# EAGLE board main_board (EAGLE 9.6.2)
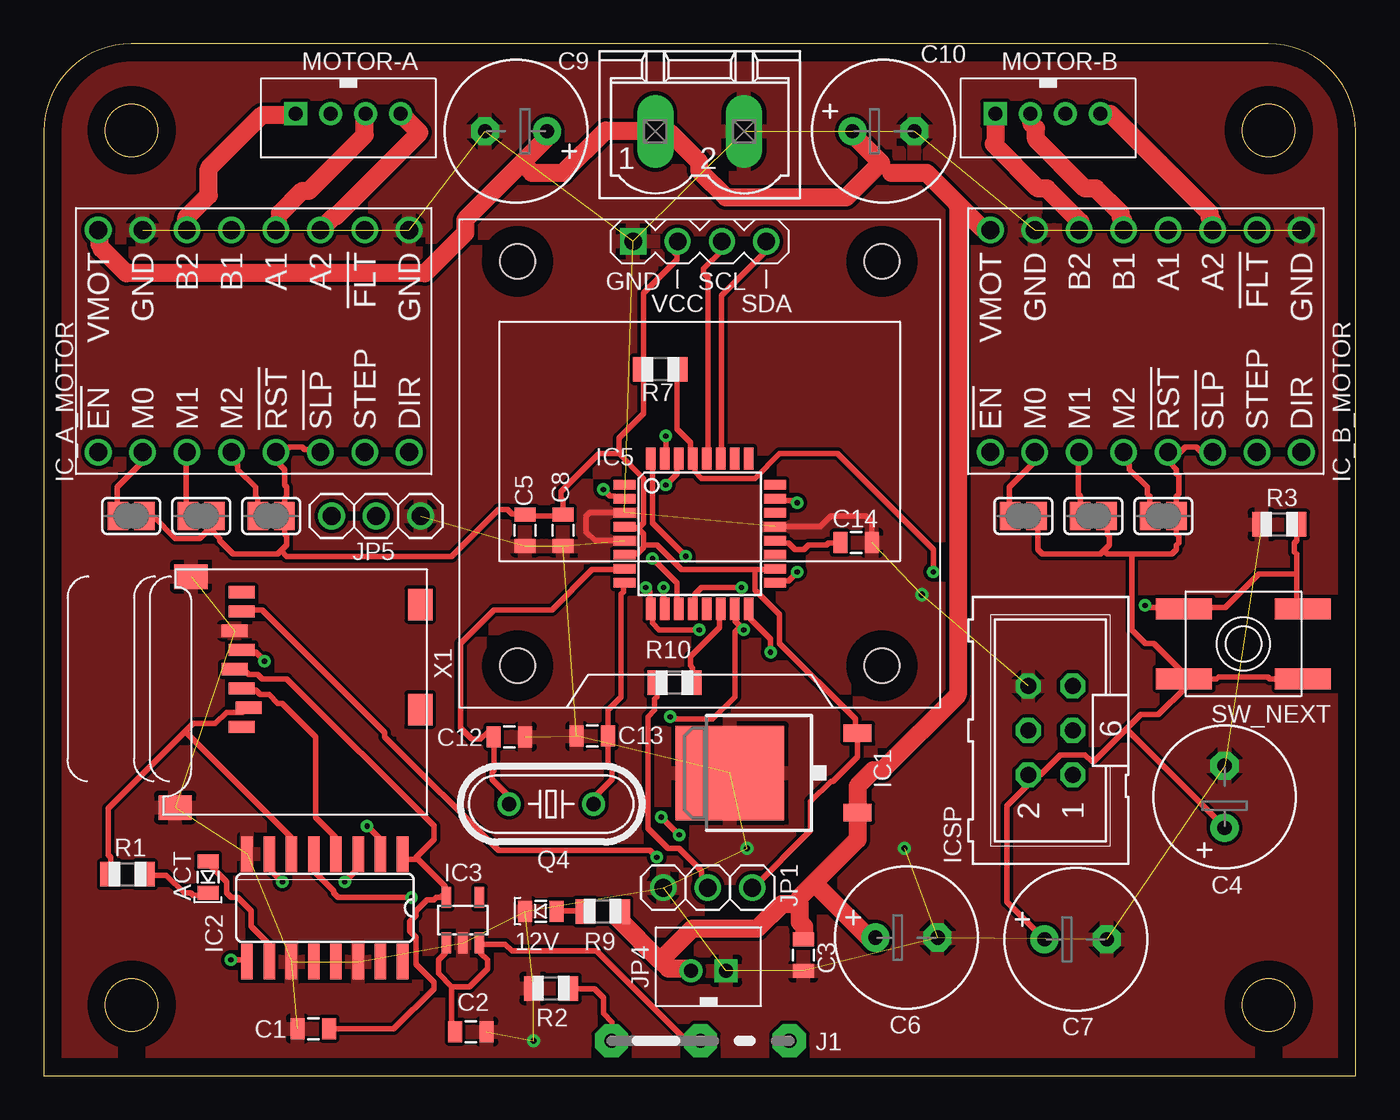
[diagram p0: board, top side]
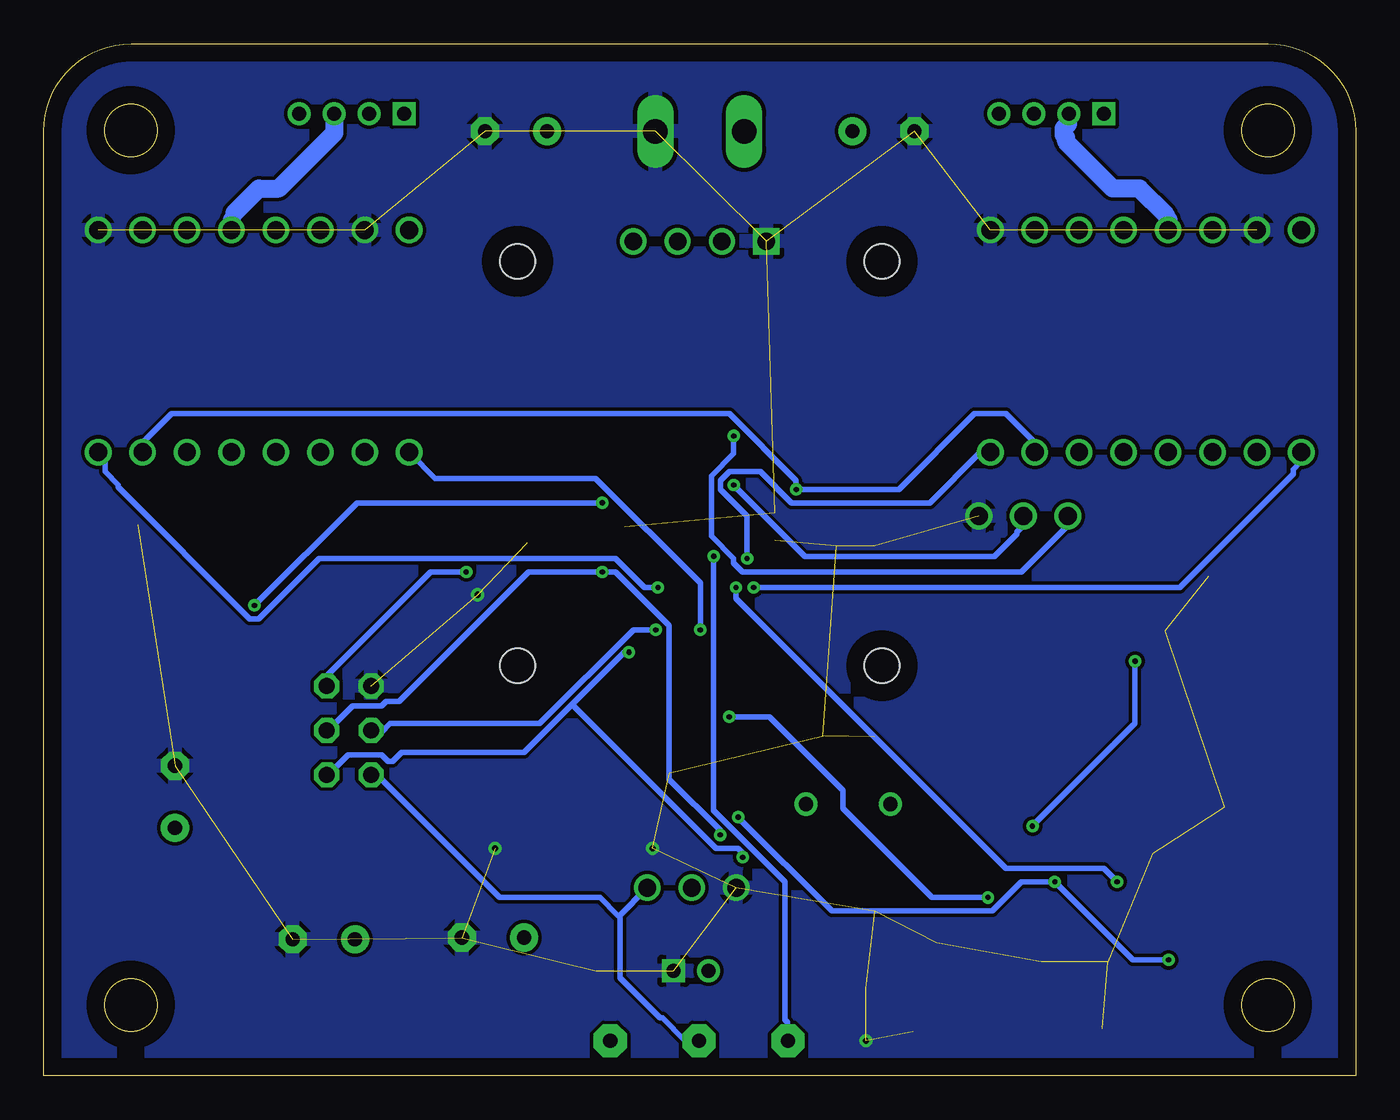
[diagram p1: board, bottom side, seen from below]

Size 75 x 59 mm. Coordinates in mm from the lower left corner, seen from the top.
Outline: 70,59 5,59 arc90 0,54 0,0 75,0 75,54 arc90 70,59
Outline: circle at 70.02,4.05 radius 1.5
Outline: circle at 5.02,54.05 radius 1.5
Outline: circle at 5.02,4.05 radius 1.5
Outline: circle at 70.02,54.05 radius 1.5
Copper layers (1*16): Top 0.035mm / dielectric 1.5mm / Bottom 0.035mm
Design rules "PCBway": minimum track width 6mil, minimum drill 0.3mm, track to track 0.205mm, track to pad 0.205mm, pad to pad 0.205mm, via to via 0.205mm, smd to smd 8mil, copper to edge 40mil, drill to drill 8mil, minimum pad ring 10mil, minimum via ring 8mil, stop-mask expansion 4mil, vias tented up to drill 25mil, thermal gap 10mil
Net classes: 0 default: width 0.305 mm; 1 highcurrent: width 0.61 mm

## Footprints (pad centres in the part's own frame; a part is rotated, then mirrored left to right if it is on the bottom)
SPARKFUN_LED-0805 = smd 1.2 x 0.8: A 0,-0.9; C 0,0.9
SPARKFUN_0805 = smd 0.8 x 1.2: 1 -0.9,0; 2 0.9,0
RCL_E3,5-8 = drill 0.813 pad 1.6: + -1.778,0 | drill 0.813 pad 1.6 octagon: - 1.778,0
LINEAR_TO252 = smd 1 x 1.6: 1 -2.28,-4.8; 2 2.28,-4.8 | smd 5.4 x 6.2: 3 0,2.5
40XX_SO16 = smd 0.66 x 2.032: 1 -4.445,-3.073; 2 -3.175,-3.073; 3 -1.905,-3.073; 4 -0.635,-3.073; 5 0.635,-3.073; 6 1.905,-3.073; 7 3.175,-3.073; 8 4.445,-3.073; 9 4.445,3.073; 10 3.175,3.073; 11 1.905,3.073; 12 0.635,3.073; 13 -0.635,3.073; 14 -1.905,3.073; 15 -3.175,3.073; 16 -4.445,3.073
ADAFRUIT_SOT23-5L = smd 0.55 x 1.2: 1 -0.95,-1.3; 2 0,-1.3; 3 0.95,-1.3; 4 0.95,1.3; 5 -0.95,1.3
SPARKFUN_TQFP32-08 = smd 1.27 x 0.559: 1 -4.293,2.8; 2 -4.293,2; 3 -4.293,1.2; 4 -4.293,0.4; 5 -4.293,-0.4; 6 -4.293,-1.2; 7 -4.293,-2; 8 -4.293,-2.8; 17 4.293,-2.8; 18 4.293,-2; 19 4.293,-1.2; 20 4.293,-0.4; 21 4.293,0.4; 22 4.293,1.2; 23 4.293,2; 24 4.293,2.8 | smd 0.559 x 1.27: 9 -2.8,-4.293; 10 -2,-4.293; 11 -1.2,-4.293; 12 -0.4,-4.293; 13 0.4,-4.293; 14 1.2,-4.293; 15 2,-4.293; 16 2.8,-4.293; 25 2.8,4.293; 26 2,4.293; 27 1.2,4.293; 28 0.4,4.293; 29 -0.4,4.293; 30 -1.2,4.293; 31 -2,4.293; 32 -2.8,4.293
POLOLU-STEPPER-DRIVER_DRV8825 = drill 1.016: 1 -6.35,8.89; 2 -6.35,6.35; 3 -6.35,3.81; 4 -6.35,1.27; 5 -6.35,-1.27; 6 -6.35,-3.81; 7 -6.35,-6.35; 8 -6.35,-8.89; 9 6.35,-8.89; 10 6.35,-6.35; 11 6.35,-3.81; 12 6.35,-1.27; 13 6.35,1.27; 14 6.35,3.81; 15 6.35,6.35; 16 6.35,8.89
ML6 = drill 0.914 octagon: 1 -2.54,-1.27; 2 -2.54,1.27; 3 0,-1.27; 4 0,1.27; 5 2.54,-1.27; 6 2.54,1.27
JUMPER_05C = drill 0.813 pad 1.905 octagon: 1 -2.54,0; 2 2.54,0; 3 7.62,0
1X03 = drill 1.016: 1 -2.54,0; 2 0,0; 3 2.54,0
B2B-PH-K-S = drill 0.813 square: 1 2,0 | drill 0.813: 2 0,0
B4B-PH-K-S = drill 0.813 square: 1 3,0 | drill 0.813: 2 1,0; 3 -1,0; 4 -3,0
CRYSTAL_HC49/S = drill 0.813: 1 -2.413,0; 2 2.413,0
ADAFRUIT_R0805 = smd 1.1 x 1.4: 1 -1,0; 2 1,0
SJ = smd 1.168 x 1.6: 1 -0.762,0; 2 0.762,0
ADAFRUIT_EVQ-Q2 = smd 3.2 x 1.2: A -3.4,-2; A' 3.4,-2; B -3.4,2; B' 3.4,2
DIY-MODULES_DISPLAY-OLED-128X64-I2C = drill 1 square: 1 -3.81,12.7 | drill 1: 2 -1.27,12.7; 3 1.27,12.7; 4 3.81,12.7 | hole 2: -10.414,11.557; 10.414,11.557; 10.414,-11.557; -10.414,-11.557
ADAFRUIT_MICROSD = smd 0.7 x 1.5: 1 9,-10.64; 2 7.9,-10.24; 3 6.8,-10.64; 4 5.7,-11.04; 5 4.6,-10.64; 6 3.5,-11.04; 7 2.4,-10.64; 8 1.3,-10.64 | smd 1.8 x 1.4: CD1 2,-0.44; CD2 8,-0.44 | smd 1.4 x 1.9: MT1 0.4,-13.54; MT2 13.6,-14.44
CON-PHOENIX-508_MSTBV2 = drill 1.397 long: 1 -2.54,0; 2 2.54,0

## Placement (x,y rotation side)
12V  [SPARKFUN_LED-0805]  28.4,9.41 90 top
ACT  RED  [SPARKFUN_LED-0805]  9.39,11.37 180 top
C1  10uF  [SPARKFUN_0805]  15.4,2.7 180 top
C2  0.1uF  [SPARKFUN_0805]  24.42,2.52 0 top
C3  0.1uF  [SPARKFUN_0805]  43.42,6.89 270 top
C4  100uF  [RCL_E3,5-8]  67.5,15.95 90 top
C5  0.1uF  [SPARKFUN_0805]  27.52,31.2 270 top
C6  100uF  [RCL_E3,5-8]  49.32,7.9 0 top
C7  100uF  [RCL_E3,5-8]  58.99,7.8 0 top
C8  0.1uF  [SPARKFUN_0805]  29.68,31.19 90 top
C9  100uF  [RCL_E3,5-8]  27,54 180 top
C10  100uF  [RCL_E3,5-8]  48,54 0 top
C12  16pF  [SPARKFUN_0805]  26.62,19.38 180 top
C13  16pF  [SPARKFUN_0805]  31.37,19.42 0 top
C14  0.1uF  [SPARKFUN_0805]  46.44,30.48 180 top
IC1  LINEAR_78DT  [LINEAR_TO252]  41.72,17.31 90 top
IC2  40XX_4050D  [40XX_SO16]  16.07,9.6 180 top
IC3  LP298XS  [ADAFRUIT_SOT23-5L]  23.96,8.9 0 top
IC5  ATMEGA328  [SPARKFUN_TQFP32-08]  37.5,30.99 0 top
IC_A_MOTOR  POLOLU-STEPPER-DRIVER_2133-DRV8825  [POLOLU-STEPPER-DRIVER_DRV8825]  12,42 90 top
IC_B_MOTOR  POLOLU-STEPPER-DRIVER_2133-DRV8825  [POLOLU-STEPPER-DRIVER_DRV8825]  63,42 90 top
ICSP  [ML6]  57.55,19.74 90 top
J1  [JUMPER_05C]  35,2 0 top
JP1  [1X03]  37.96,10.75 180 top
JP4  2PIN  [B2B-PH-K-S]  37,6 0 top
JP5  [1X03]  19,32 0 top
MOTOR-A  4PIN  [B4B-PH-K-S]  17.4,55 180 top
MOTOR-B  4PIN  [B4B-PH-K-S]  57.4,55 180 top
Q4  16MHZ  [CRYSTAL_HC49/S]  29.01,15.53 180 top
R1  1.0k  [ADAFRUIT_R0805]  4.79,11.52 0 top
R2  10k  [ADAFRUIT_R0805]  29,5 0 top
R3  10k  [ADAFRUIT_R0805]  70.63,31.52 0 top
R7  10k  [ADAFRUIT_R0805]  35.24,40.4 180 top
R9  2.2k  [ADAFRUIT_R0805]  31.95,9.4 0 top
R10  330  [ADAFRUIT_R0805]  36.05,22.48 180 top
SJ1  [SJ]  5,32 180 top
SJ2  [SJ]  9,32 180 top
SJ3  [SJ]  13,32 180 top
SJ4  [SJ]  56,32 180 top
SJ5  [SJ]  60,32 180 top
SJ6  [SJ]  64,32 180 top
SW_NEXT  S_TACT  [ADAFRUIT_EVQ-Q2]  68.58,24.69 180 top
U$1  DIY-MODULES_DISPLAY-OLED-128X64-I2C  [DIY-MODULES_DISPLAY-OLED-128X64-I2C]  37.5,35 0 top
X1  MICROSD_SMD  [ADAFRUIT_MICROSD]  21.96,28.94 270 top
X4  CON-PHOENIX-508_MST2V  [CON-PHOENIX-508_MSTBV2]  37.5,53.99 0 top

## Library data of the parts
12V ACT = main_board; MFR: Würth Elektronik; MFR_PN: 150080RS75000; VENDOR: digikey; VENDOR_PN: 732-4984-1-ND
C1 = main_board; MFR: Samsung Electro-Mechanics; MFR_PN: CL21A106KPCLQNC; VENDOR: digikey; VENDOR_PN: 1276-2402-1-ND
C2 C3 C5 C8 C14 = main_board; MFR: Samsung Electro-Mechanics; MFR_PN: CL21B104KBCNFNC; VENDOR: digikey; VENDOR_PN: 1276-2444-1-ND
C4 C6 C7 C9 C10 = main_board; MFR: rubycon; MFR_PN: 16ZLH100MEFC5X11; VENDOR: digikey; VENDOR_PN: 1189-1148-ND
C12 C13 = main_board; MFR: YAGEO; MFR_PN: CC0805JRNPO9BN160; VENDOR: digikey; VENDOR_PN: 311-4228-1-ND
IC1 = main_board; MFR: Rohm Semiconductor; MFR_PN: BA17805FP-E2; VENDOR: digikey; VENDOR_PN: BA17805FP-E2CT-ND
IC2 = main_board; MFR: toshiba; MFR_PN: 74HC4050D; VENDOR: digikey; VENDOR_PN: 74HC4050DCT-ND
IC3 = main_board; MFR: texas Instruments; MFR_PN: LP2980IM5X-3.3/NOPB; VENDOR: mouser; VENDOR_PN: 926-LP2980IM5X33NOPB
IC5 = main_board; MFR: microchip; MFR_PN: ATMEGA328PB-AU; VENDOR: digikey; VENDOR_PN: ATMEGA328PB-AU-ND
IC_A_MOTOR IC_B_MOTOR = main_board; MFR: Pololu; MFR_PN: 2133; VENDOR: Pololu; VENDOR_PN: 2133
ICSP = con-harting-ml
J1 = main_board; MFR: Yuandi; MFR_PN: TC-5610D1-T; VENDOR: lcsc electronics; VENDOR_PN: C504863
JP1 JP5 = adafruit
JP4 MOTOR-A MOTOR-B = jst_eph
Q4 = main_board; MFR: IQD Frequency Products; MFR_PN: LFXTAL003240BULK; VENDOR: digikey; VENDOR_PN: 1923-1433-ND
R1 = main_board; MFR: Stackpole Electronics Inc; MFR_PN: RMCF0805FT1K00; VENDOR: digikey; VENDOR_PN: RMCF0805FT1K00CT-ND
R2 R3 R7 = main_board; MFR: Stackpole Electronics Inc; MFR_PN: RMCF0805FT10K0; VENDOR: digikey; VENDOR_PN: RMCF0805FT10K0CT-ND
R9 = main_board; MFR: Panasonic Electronic Components; MFR_PN: ERA-6AED222V; VENDOR: digikey; VENDOR_PN: P2.2KBNCT-ND
R10 = main_board; MFR: TE Connectivity Passive Product; MFR_PN: CRGCQ0805F330R; VENDOR: digikey; VENDOR_PN: A129743CT-ND
SJ1-SJ6 = jumper
SW_NEXT = main_board; MFR: panasonic; MFR_PN: EVQ-Q2D03W; VENDOR: digikey; VENDOR_PN: P12935SCT-ND
U$1 = main_board; MFR: adafruit; MFR_PN: 326; VENDOR: adafruit; VENDOR_PN: 326
X1 = main_board; MFR: Amphenol ICC (Commercial Products); MFR_PN: GTFP08432B1HR; VENDOR: digikey; VENDOR_PN: 664-GTFP08432B1HRCT-ND
X4 = main_board; MFR: Phoenix Contact; MFR_PN: 1734656; VENDOR: digikey; VENDOR_PN: 277-1979-ND

## Nets
+3V3: C1.1 IC2.1 IC3.5 X1.4
+12V [highcurrent]: C3.1 C6.+ C9.+ C10.+ IC1.1 IC_A_MOTOR.16 IC_B_MOTOR.16 JP4.2 R9.2 X4.1
A0: IC5.23 R3.2 SW_NEXT.A SW_NEXT.A'
A1: IC5.24
A2: IC5.25
A3: IC5.26
A4: IC5.27 U$1.4
A5: IC5.28 U$1.3
A6: IC5.19
A7: IC5.22
D2: IC5.32 J1.1 R2.2
D3: IC5.1
D4: IC5.2 IC_A_MOTOR.7 IC_B_MOTOR.7
D5: IC5.9 IC_A_MOTOR.1 IC_B_MOTOR.1
D6: IC2.7 IC5.10
D7: IC5.11 IC_A_MOTOR.8
D8: IC5.12 IC_B_MOTOR.8
D9: IC5.13
D10: IC5.14 R10.1
D11: IC2.5 IC5.15 ICSP.4
D12: IC5.16 ICSP.1 X1.7
D13: IC2.3 IC2.9 IC5.17 ICSP.3
GND: 12V.C C1.2 C2.2 C3.2 C4.- C5.2 C6.- C7.- C8.1 C9.- C10.- C12.1 C13.1 C14.1 IC1.3 IC2.8 IC2.11 IC2.14 IC3.2 IC5.3 IC5.5 IC5.21 IC_A_MOTOR.9 IC_A_MOTOR.15 IC_B_MOTOR.9 IC_B_MOTOR.15 ICSP.6 JP1.3 JP4.1 JP5.3 R2.1 R3.1 U$1.1 X1.6 X1.MT1 X1.MT2 X4.2
N$1: ACT.A IC2.10
N$2: IC2.2 X1.5
N$3: IC2.6 R1.1 X1.2
N$4: ACT.C R1.2
N$5: IC2.4 X1.3
N$6: JP1.2 R10.2
N$7: IC_A_MOTOR.2 SJ1.2
N$8: IC_A_MOTOR.3 SJ2.2
N$9: IC_A_MOTOR.4 SJ3.2
N$10: IC_B_MOTOR.2 SJ4.2
N$11: IC_B_MOTOR.3 SJ5.2
N$12: IC_B_MOTOR.4 SJ6.2
N$13 [highcurrent]: IC_A_MOTOR.14 MOTOR-A.1
N$14 [highcurrent]: IC_A_MOTOR.13 MOTOR-A.2
N$15 [highcurrent]: IC_A_MOTOR.12 MOTOR-A.3
N$16 [highcurrent]: IC_A_MOTOR.11 MOTOR-A.4
N$17 [highcurrent]: IC_B_MOTOR.14 MOTOR-B.1
N$18 [highcurrent]: IC_B_MOTOR.13 MOTOR-B.2
N$19 [highcurrent]: IC_B_MOTOR.12 MOTOR-B.3
N$20: C14.2 IC5.20
N$21 [highcurrent]: IC_B_MOTOR.11 MOTOR-B.4
N$26: 12V.A R9.1
N$31: C12.2 IC5.7 Q4.2
N$32: C13.2 IC5.8 Q4.1
RESET: IC5.29 ICSP.5 R7.1
RX: IC5.30 JP5.2
TX: IC5.31 JP5.1
VCC: C2.1 C4.+ C5.1 C7.+ C8.2 IC1.2 IC3.1 IC3.3 IC5.4 IC5.6 IC5.18 IC_A_MOTOR.5 IC_A_MOTOR.6 IC_B_MOTOR.5 IC_B_MOTOR.6 ICSP.2 J1.2 JP1.1 R7.2 SJ1.1 SJ2.1 SJ3.1 SJ4.1 SJ5.1 SJ6.1 SW_NEXT.B SW_NEXT.B' U$1.2

## Tracks (layer width: path | path; a pad name or v marks a point on that pad's centre or on a via)
+3V3
  Top 0.305: 21.28,12.36 20.77,12.36 20.52,12.62 IC2.1 | 21.28,12.36 21.41,12.36 22.94,10.83 22.94,10.32 IC3.5 22.81,10.32 22.69,10.2 22.43,10.2 22.3,10.07 21.92,10.07 21.28,9.43 21.28,9.18 20.9,8.79 20.9,8.28 21.28,7.9 21.28,6.37 22.3,5.35 22.3,4.97 20.01,2.68 17,2.68 16.95,2.68 16.32,2.68 C1.1 | X1.4 10.96,23.2 11.47,23.2 11.72,22.94 12.23,22.94 12.49,22.69 13.89,22.69 22.3,14.27 22.3,13.51 21.28,12.49 21.28,12.36
+12V
  Top 0.61: 43.21,10.2 43.21,9.81 | 43.46,7.9 C3.1 | 47.86,52.19 48.43,51.62 | 3.19,47.54 3.31,47.41 3.31,47.28 | 28.68,53.91 28.68,53.53 | 34.92,54.04 X4.1 | 35.18,53.91 35.81,53.91 | 46.52,15.29 IC1.1
  Top 1.016: 35.24,6.58 35.71,6.12 36.96,6.12 JP4.2 | 35.24,6.58 32.85,8.97 R9.2 | 43.46,7.9 43.46,8.54 43.21,8.79 43.21,9.81 42.19,9.81 40.78,8.41 37.07,8.41 35.24,6.58 | 44.03,11.02 46.52,13.51 46.52,14.91 IC1.1 | 44.03,11.02 43.21,10.2 | 44.03,11.02 47.16,7.9 C6.+ | 52.32,49.77 50.47,51.62 48.43,51.62 | 52.32,49.77 53.66,48.43 54.04,48.43 IC_B_MOTOR.16 | C10.+ 46.14,53.91 47.86,52.19 45.88,50.22 39,50.22 37.47,51.74 37.47,52.26 35.81,53.91 | 3.19,47.54 3.19,48.3 IC_A_MOTOR.16 | 3.31,47.28 4.72,45.88 21.79,45.88 24.09,48.18 24.09,48.94 27.34,52.19 | 28.68,53.53 27.34,52.19 | 28.68,53.91 C9.+ | 34.92,54.04 32.12,54.04 29.7,51.62 27.91,51.62 27.34,52.19 | 35.18,53.91 X4.1 | 46.52,15.29 46.52,16.57 47.41,17.46 47.92,17.46 52.24,21.78 52.24,49.7 52.32,49.77
A0  (via drill 0.3)
  Top 0.305: 71.63,28.68 71.63,27.02 71.88,26.77 SW_NEXT.A | 71.63,28.68 71.63,29.82 71.5,29.95 71.5,30.46 71.63,30.59 71.63,31.48 R3.2 | v43.08,32.76 42.95,32.88 41.8,32.88 IC5.23 | v62.96,26.89 63.09,26.77 65.13,26.77 SW_NEXT.A' 65.25,26.77 67.55,26.77 69.46,28.68 71.63,28.68
  Bottom 0.305: v43.08,32.76 57.1,32.76 v62.96,26.89
A4
  Top 0.305: IC5.27 38.74,35.3 38.74,44.61 41.29,47.16 41.29,47.67 U$1.4
A5
  Top 0.305: IC5.28 37.98,35.3 37.98,45.63 37.73,45.88 37.73,46.14 38.74,47.16 38.74,47.67 U$1.3
D2  (via drill 0.3)
  Top 0.305: v36.71,29.7 34.79,31.61 34.79,35.18 IC5.32 | R2.2 30.08,4.97 31.48,4.97 31.99,4.46 31.99,3.57 32.5,3.06 32.5,2.04 J1.1
  Bottom 0.305: v36.71,29.7 36.71,15.17 32.63,11.09 32.63,3.19 32.5,3.06 32.5,2.04 J1.1
D4  (via drill 0.3)
  Top 0.305: v31.99,33.52 32.37,33.14 32.63,33.14 32.76,33.01 33.14,33.01 IC5.2
  Bottom 0.305: IC_A_MOTOR.7 18.35,35.69 18.35,36.2 20.01,37.85 21.79,37.85 26.13,33.52 v31.99,33.52 31.99,34.03 35.81,37.85 67.68,37.85 69.33,36.2 69.33,35.69 IC_B_MOTOR.7
D5  (via drill 0.3)
  Top 0.305: v37.47,25.49 35.18,25.49 34.79,25.87 34.79,26.64 IC5.9 34.67,26.77 34.67,27.66 v34.41,27.91
  Bottom 0.305: v37.47,25.49 37.47,28.17 43.46,34.16 52.64,34.16 54.04,35.56 IC_B_MOTOR.1 | v34.41,27.91 10.07,27.91 3.57,34.41 3.57,34.67 3.19,35.05 3.19,35.56 IC_A_MOTOR.1
D6  (via drill 0.3)
  Top 0.305: v35.43,27.91 35.43,26.77 IC5.10 | v13.64,11.09 13,11.72 13,12.62 IC2.7
  Bottom 0.305: v35.43,27.91 35.43,27.27 20.01,11.85 14.4,11.85 v13.64,11.09
D7  (via drill 0.3)
  Top 0.305: v34.79,29.57 36.2,28.17 36.2,26.77 IC5.11
  Bottom 0.305: v34.79,29.57 34.79,31.99 36.32,33.52 36.32,34.03 35.81,34.54 34.03,34.54 32.24,32.76 24.34,32.76 21.54,35.56 20.9,35.56 IC_A_MOTOR.8
D8  (via drill 0.3)
  Top 0.305: v39.89,27.91 37.6,27.91 37.22,27.53 37.22,26.77 IC5.12
  Bottom 0.305: v39.89,27.91 40.66,27.91 42.31,29.57 59.26,29.57 62.7,26.13 63.22,26.13 70.73,33.65 70.73,33.77 71.5,34.54 71.5,35.05 72.01,35.56 IC_B_MOTOR.8
D10
  Top 0.305: IC5.14 38.62,26.64 38.62,25.62 36.96,23.96 36.96,23.45 37.09,23.32 37.09,22.56 R10.1
D11  (via drill 0.3)
  Top 0.305: IC5.15 39.51,26.64 39.51,26 v40.02,25.49 39.76,25.62 39.51,25.36 39.51,21.67 38.23,20.39 35.94,20.39 v35.81,20.52 | v21.03,10.2 16.82,10.2 16.57,10.45 16.57,10.58 15.42,11.72 15.42,12.62 IC2.5
  Bottom 0.305: v40.02,25.49 41.29,25.49 46.65,20.14 55.19,20.14 55.7,19.63 56.2,19.63 ICSP.4 | v21.03,10.2 24.21,10.2 29.31,15.29 29.31,16.31 33.52,20.52 v35.81,20.52
D12  (via drill 0.3)
  Top 0.305: v41.55,24.21 41.55,24.98 40.4,26.13 40.4,26.64 IC5.16 | v35.05,12.49 34.67,12.87 26,12.87 19.5,19.37 19.5,19.63 12.49,26.64 11.34,26.64 X1.7
  Bottom 0.305: v41.55,24.21 41.8,24.21 44.8,21.22 | 44.8,21.22 47.54,18.48 54.55,18.48 55.06,17.97 55.31,17.97 55.7,18.35 57.61,18.35 58.75,17.21 ICSP.1 | v35.05,12.49 35.05,12.74 35.3,13 36.58,13 44.8,21.22
D13  (via drill 0.3)
  Top 0.305: v10.71,6.63 11.6,6.63 IC2.9 | v17.21,11.09 17.97,11.85 17.97,12.62 IC2.3 | v43.08,28.8 42.57,28.29 41.8,28.29 IC5.17 | v36.32,13.77 v35.3,14.78
  Bottom 0.305: v10.71,6.63 12.74,6.63 v17.21,11.09 19.12,11.09 20.77,9.43 29.95,9.43 v35.3,14.78 | ICSP.3 58.75,19.75 57.35,21.16 55.7,21.16 55.44,21.41 54.68,21.41 47.28,28.8 v43.08,28.8 42.31,28.8 39.26,25.75 39.26,16.95 36.32,14.02 v36.32,13.77
GND  (via drill 0.35)  (38 unrouted)
  Top 0.305: IC5.3 31.19,32.19 31,32 31,31.1 31.51,30.59 IC5.5 | IC5.21 44.39,31.39 45,32 47,32 47.34,31.66 C14.1
  other vias: 28,2 40.2,13 50.2,27.5 49.2,13
  pour Top: -4,63 -4,-4 -3,-5 77,-5 79,-3 79,61 77,63
  pour Bottom: -9,67 84,67 84,-7 82,-9 -8,-9 -9,-8
N$1
  Top 0.305: ACT.A 9.43,12.36 9.43,12.11 10.45,11.09 10.45,10.45 10.71,10.2 11.09,10.2 11.85,9.43 11.85,8.54 13,7.39 13,6.63 IC2.10
N$2  (via drill 0.3)
  Top 0.305: v12.62,23.71 12.11,24.21 11.34,24.21 X1.5 | v18.48,14.27 19.25,13.51 19.25,12.74 IC2.2
  Bottom 0.305: v12.62,23.71 12.62,20.14 v18.48,14.27
N$3
  Top 0.305: 8.09,19.69 8.54,20.14 9.81,20.14 10.45,20.77 11.34,20.77 11.6,21.03 X1.2 | 8.09,19.69 3.7,15.29 3.7,12.62 3.82,12.49 3.82,11.6 R1.1 | 8.09,19.69 14.15,13.64 14.15,12.74 IC2.6
N$4
  Top 0.305: ACT.C 9.3,10.32 8.54,10.32 8.41,10.45 8.03,10.45 7.01,11.47 5.86,11.47 R1.2
N$5
  Top 0.305: X1.3 11.34,22.05 12.11,22.05 12.36,21.79 12.87,21.79 13.38,21.28 13.64,21.28 15.55,19.37 15.55,14.78 16.7,13.64 16.7,12.74 IC2.4
N$6
  Top 0.305: R10.2 35.05,22.43 35.05,21.67 34.92,21.54 34.92,20.9 34.54,20.52 34.54,14.15 35.69,13 36.32,13 37.6,11.72 37.6,11.47 37.85,11.22 37.85,10.83 JP1.2
N$7
  Top 0.305: SJ1.2 4.21,32.12 4.21,33.65 5.61,35.05 5.61,35.56 IC_A_MOTOR.2
N$8
  Top 0.305: SJ2.2 8.16,32.12 8.16,35.56 IC_A_MOTOR.3
N$9
  Top 0.305: SJ3.2 12.23,32.12 12.23,33.01 12.11,33.14 12.11,33.65 11.09,34.67 11.09,34.92 10.83,35.18 10.83,35.56 IC_A_MOTOR.4
N$10
  Top 0.305: SJ4.2 55.19,32.12 55.19,33.65 56.59,35.05 56.59,35.56 IC_B_MOTOR.2
N$11
  Top 0.305: SJ5.2 59.26,32.12 59.26,33.14 59.14,33.26 59.14,35.56 IC_B_MOTOR.3
N$12
  Top 0.305: SJ6.2 63.22,32.12 63.22,33.14 63.09,33.26 63.09,33.65 62.07,34.67 62.07,34.92 61.81,35.18 61.81,35.56 IC_B_MOTOR.4
N$13
  Top 0.61: 8.16,48.43 IC_A_MOTOR.14
  Top 1.016: 8.16,48.43 8.16,49.07 9.43,50.34 9.43,51.87 12.49,54.93 14.27,54.93 MOTOR-A.1
N$14
  Bottom 0.61: 16.57,53.66 16.7,53.78 | 10.83,49.2 10.83,49.07 10.71,48.94 | 10.71,48.43 IC_A_MOTOR.13
  Bottom 1.016: 16.7,53.78 16.7,54.17 16.44,54.42 16.44,54.93 MOTOR-A.2 | 16.57,53.66 16.57,53.4 13.89,50.73 12.36,50.73 10.83,49.2 | 10.71,48.43 10.71,48.94
N$15
  Top 0.61: 13.51,49.32 13.51,48.94 13.38,48.81 | 18.35,54.93 MOTOR-A.3 | 13.38,48.43 IC_A_MOTOR.12
  Top 1.016: 18.35,54.93 18.35,53.78 15.17,50.6 14.78,50.6 13.51,49.32 | 13.38,48.43 13.38,48.81
N$16
  Top 1.016: MOTOR-A.4 21.48,53.92 16.7,49.14 16.6,49.14 IC_A_MOTOR.11
N$17
  Top 0.61: 54.42,53.53 54.29,53.4 54.29,53.27 | 59.26,48.43 59.26,48.81 | 54.42,54.93 MOTOR-B.1
  Top 1.016: 54.42,53.53 54.42,54.93 | 54.29,53.27 56.84,50.73 57.35,50.73 59.26,48.81 | 59.26,48.43 IC_B_MOTOR.14
N$18
  Top 0.61: 56.72,54.17 56.46,54.42 | 61.69,48.94 61.56,49.07
  Top 1.016: 56.46,54.42 56.46,54.93 MOTOR-B.2 | 56.72,54.17 56.72,53.53 59.52,50.73 60.16,50.73 61.56,49.32 61.56,49.07 | 61.69,48.94 61.69,48.43 IC_B_MOTOR.13
N$19
  Bottom 0.61: 64.11,49.32 64.11,49.07 64.23,48.94
  Bottom 1.016: 64.11,49.32 62.7,50.73 61.56,50.73 58.37,53.91 58.37,54.93 MOTOR-B.3 | 64.23,48.94 64.23,48.43 IC_B_MOTOR.12
N$20
  Top 0.305: C14.2 45.5,30.46 44.86,30.46 44.73,30.33 43.72,30.33 43.46,30.08 42.95,30.08 42.57,30.46 41.93,30.46 41.8,30.59 IC5.20
N$21
  Top 0.61: 66.66,49.07 66.66,49.32
  Top 1.016: 66.66,49.32 60.98,55 MOTOR-B.4 | 66.66,49.07 66.78,48.94 66.78,48.43 IC_B_MOTOR.11
N$26
  Top 0.305: R9.1 30.97,9.43 29.31,9.43 12V.A
N$31
  Top 0.305: Q4.2 26.51,15.55 26.51,16.06 25.62,16.95 25.62,17.33 25.75,17.46 25.75,19.37 C12.2 25.62,19.5 25.49,19.63 25.36,19.63 24.98,19.25 24.47,19.25 23.83,19.88 23.83,24.73 25.75,26.64 29.06,26.64 31.35,28.93 33.14,28.93 IC5.7
N$32
  Top 0.305: Q4.1 31.48,15.55 31.48,15.93 32.5,16.95 32.5,17.59 32.24,17.84 32.24,19.37 C13.2 32.24,19.5 32.24,20.9 33.01,21.67 33.01,27.53 33.14,27.66 33.14,28.17 IC5.8
RESET  (via drill 0.3)
  Top 0.305: R7.1 36.2,40.27 36.2,36.96 36.96,36.2 36.96,35.43 37.09,35.3 IC5.29 37.22,35.18 37.22,34.54 37.6,34.16 40.66,34.16 42.06,35.56 45.37,35.56 50.85,30.08 v50.85,28.8
  Bottom 0.305: v50.85,28.8 52.89,28.8 58.75,22.94 58.75,22.3 ICSP.5
RX  (via drill 0.3)
  Top 0.305: v35.56,33.77 36.2,34.41 36.2,35.18 IC5.30
  Bottom 0.305: v35.56,33.77 31.48,29.7 20.65,29.7 19.37,30.97 19.37,31.1 19.12,31.35 19.12,31.99 JP5.2
TX  (via drill 0.3)
  Top 0.305: v35.56,36.58 35.56,35.3 IC5.31
  Bottom 0.305: v35.56,36.58 35.56,35.56 36.83,34.28 36.83,30.84 35.56,29.57 35.56,29.31 35.05,28.8 19.12,28.8 16.57,31.35 16.57,31.99 JP5.1
VCC
  Top 0.305: 60.6,30.01 60.92,30.33 60.92,30.84 60.79,30.97 60.79,31.99 SJ5.1 | 60.6,30.01 60.41,29.82 57.1,29.82 56.84,30.08 56.84,31.99 SJ4.1 | IC_B_MOTOR.6 66.78,35.69 66.15,35.69 65.89,35.94 65.25,35.94 64.87,35.56 64.49,35.56 IC_B_MOTOR.5 64.36,35.56 64.36,35.05 64.75,34.67 64.75,34.41 64.87,34.28 64.87,33.26 64.75,33.14 64.75,32.12 SJ6.1 64.75,31.86 64.75,30.97 64.87,30.84 64.87,30.46 64.75,30.33 64.75,30.08 64.49,29.82 62.2,29.82 | 60.6,30.01 60.79,29.82 62.2,29.82 | 61.88,19.82 62.7,20.65 63.73,20.65 65.25,22.18 65.25,22.69 SW_NEXT.B' | 61.88,19.82 60.03,17.97 59.9,17.97 59.52,18.35 58.12,18.35 56.97,17.21 56.33,17.21 ICSP.2 56.2,17.08 56.2,16.57 55.06,15.42 55.06,9.94 57.1,7.9 C7.+ | SW_NEXT.B 71.88,22.69 70.1,22.69 69.97,22.81 67.17,22.81 67.04,22.69 65.38,22.69 SW_NEXT.B' | 61.88,19.82 67.42,14.27 C4.+ | 62.2,29.82 62.2,25.49 62.96,24.73 63.47,24.73 65.38,22.81 SW_NEXT.B' | JP1.1 40.53,10.71 43.84,14.02 43.84,15.68 44.99,16.82 45.12,16.82 46.52,18.23 46.52,19.5 IC1.2 46.39,19.63 46.39,20.39 42.06,24.73 42.06,26.38 40.66,27.78 40.66,28.93 | 23.32,5.1 22.56,5.86 22.56,6.63 22.94,7.01 22.94,7.52 IC3.1 | 23.32,5.1 23.32,2.55 C2.1 | 23.32,5.1 24.34,5.1 25.36,6.12 25.36,6.63 24.98,7.01 24.98,7.52 IC3.3 25.11,7.52 26.38,7.52 26.77,7.14 31.61,7.14 36.71,2.04 37.47,2.04 J1.2 | SJ1.1 5.86,31.99 6.25,31.99 7.52,30.71 8.92,30.71 9.69,31.48 9.69,31.99 SJ2.1 9.56,31.23 10.07,30.71 10.07,30.59 10.83,29.82 13.38,29.82 13.57,30.01 | 13.57,30.01 13.89,30.33 13.89,30.84 13.77,30.97 13.77,31.86 SJ3.1 13.77,32.12 13.77,33.01 13.89,33.14 13.89,33.65 13.77,33.77 13.77,34.67 13.38,35.05 13.38,35.56 IC_A_MOTOR.5 13.51,35.43 14.02,35.94 14.78,35.94 14.91,35.81 15.04,35.81 15.17,35.69 15.8,35.69 IC_A_MOTOR.6
  Top 0.305: U$1.2 36.2,47.67 36.07,47.54 36.07,47.03 36.2,46.9 36.2,46.65 34.28,44.73 34.28,40.4 R7.2 34.28,40.27 34.28,37.85 32.88,36.45 32.88,35.56 | 34.28,30.33 34.28,30.97 33.97,31.29 | 34.28,30.33 34.28,30.21 33.9,29.82 33.26,29.82 IC5.6 | 33.97,31.29 33.9,31.35 33.26,31.35 IC5.4 | 40.66,28.93 36.45,28.93 35.05,30.33 34.28,30.33 | 40.66,28.93 41.68,28.93 IC5.18 | 32.88,35.56 31.73,35.56 29.57,33.39 29.57,33.01 29.7,32.88 29.7,32.12 C8.2 29.57,31.99 27.53,31.99 C5.1 27.4,32.12 26.77,32.12 26.51,32.37 26,32.37 23.32,29.7 13.89,29.7 13.57,30.01 | 32.88,35.56 34.28,34.16 34.28,31.61 33.97,31.29
  Bottom 0.305: 42.06,9.18 40.53,10.71 JP1.1 | 42.06,9.18 42.06,5.61 39.76,3.31 39.64,3.31 38.36,2.04 37.6,2.04 J1.2 | ICSP.2 56.2,17.08 55.82,17.08 48.94,10.2 43.21,10.2 42.19,9.18 42.06,9.18